# Altium PCB PCB.PcbDoc
Units mm, origin at the board's own origin, x right, y up, seen from the top; angles counter-clockwise.
Board outline 107 x 82 mm, 2 copper layers (Top Layer, Bottom Layer); 41 components, 43 nets, 366 pads, 159 vias.
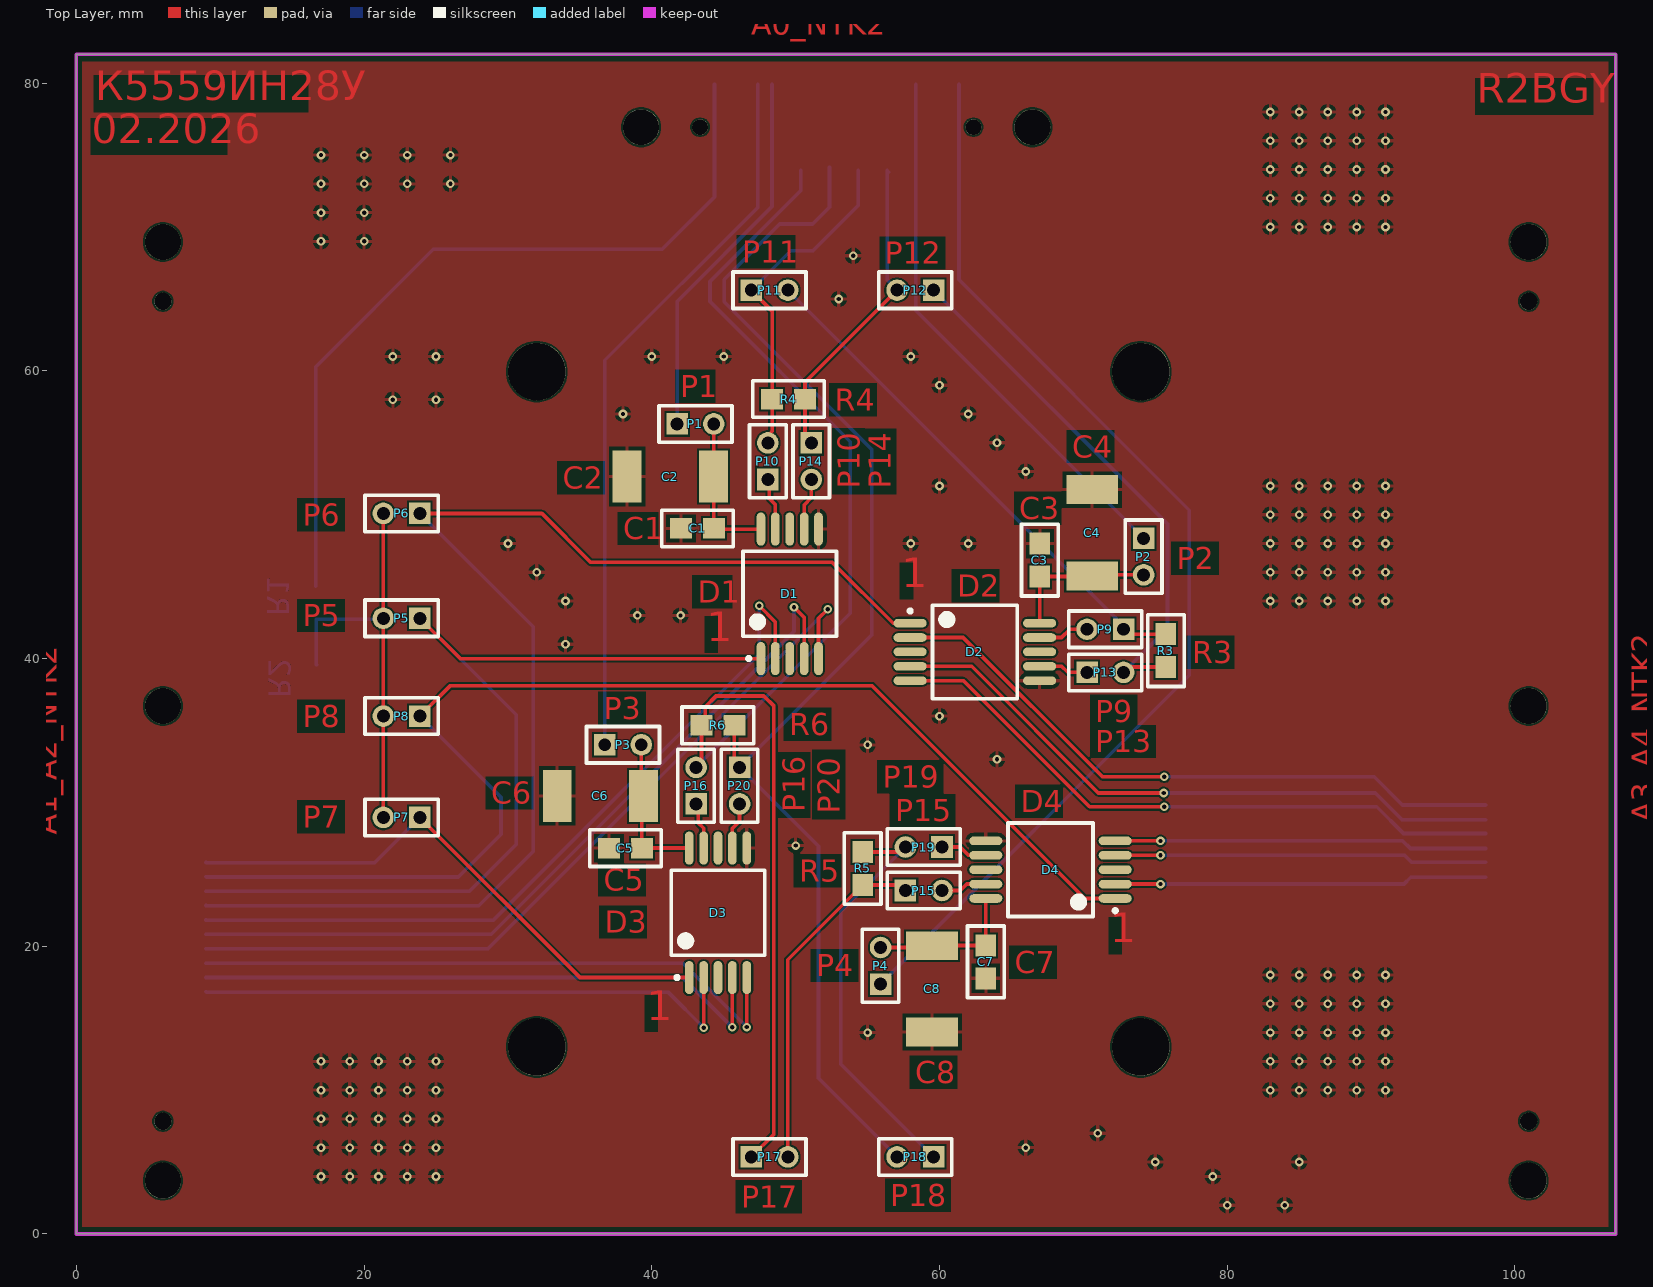
[diagram p0: Top Layer view]
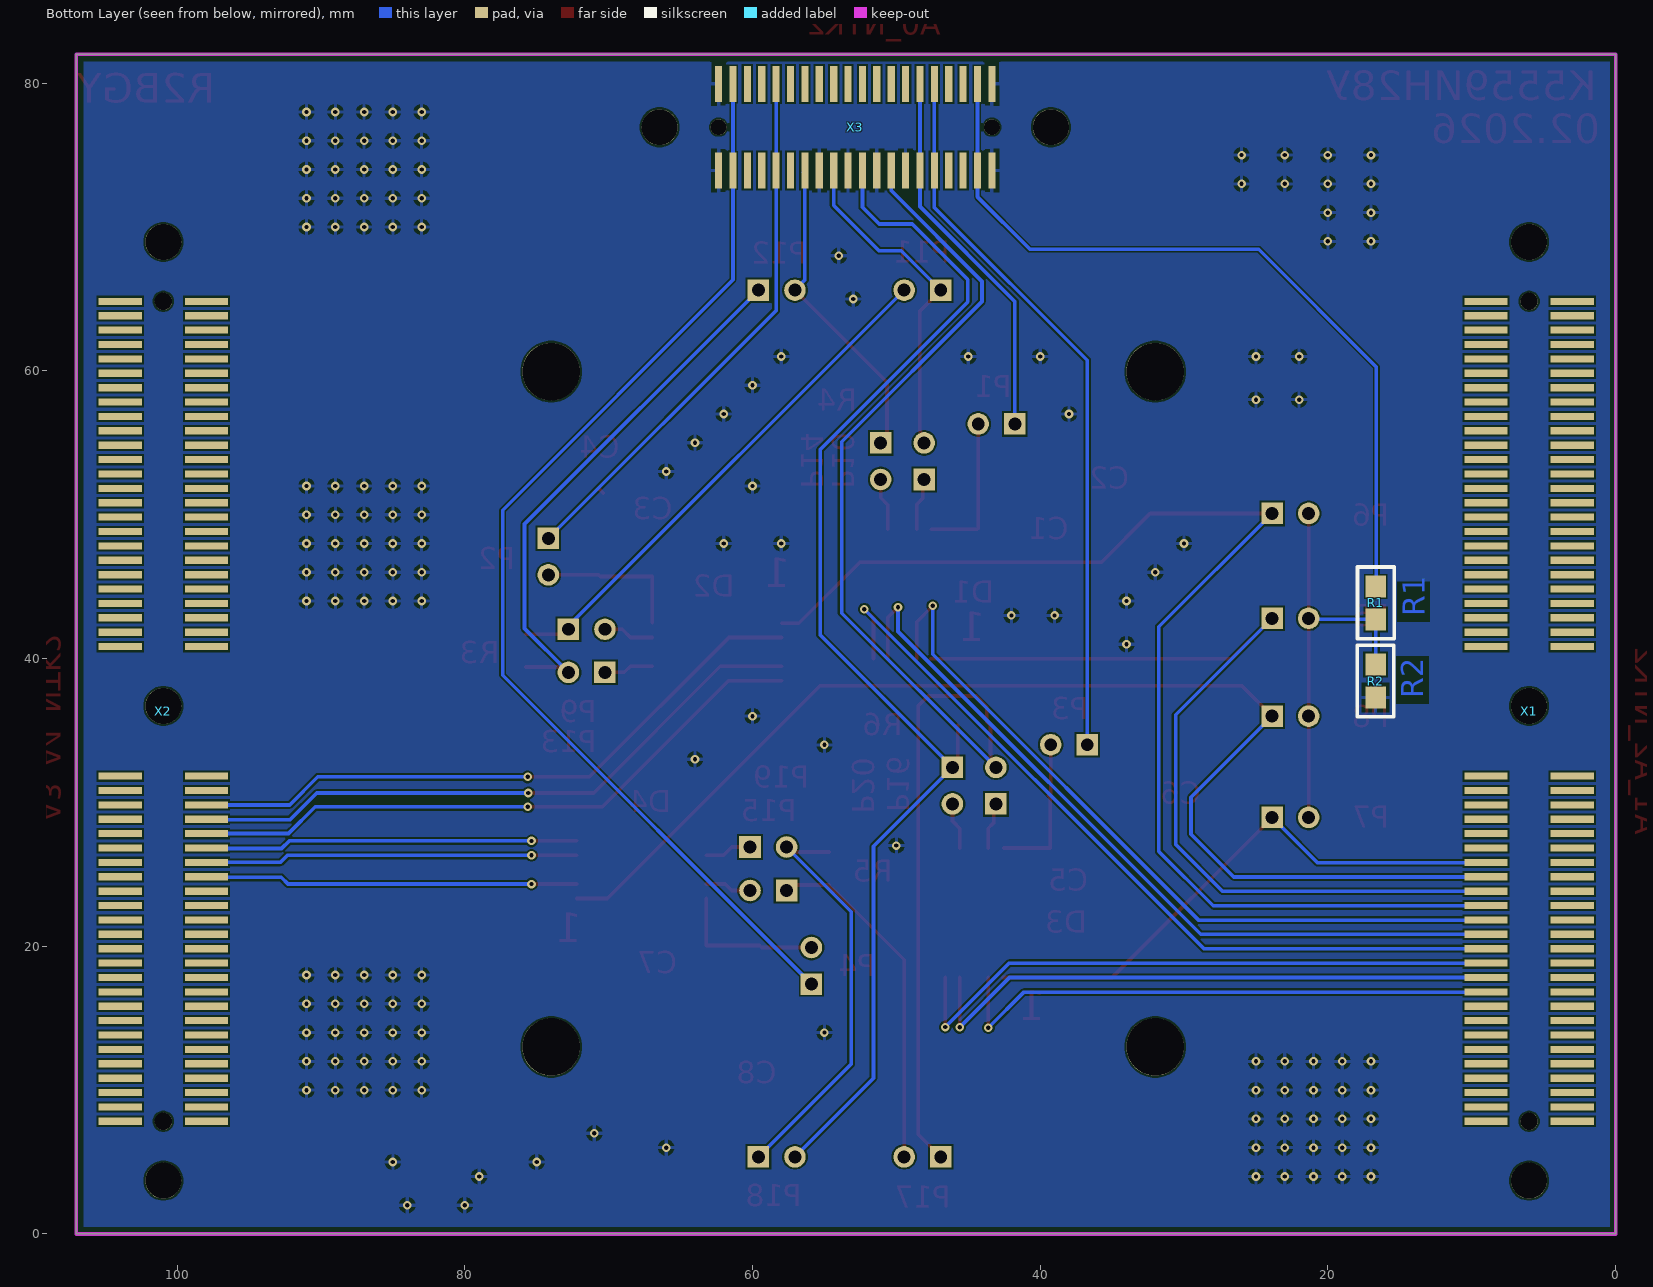
[diagram p1: Bottom Layer view, seen from below]

## Layer stack, top to bottom
Top Solder: solder mask 0.0102, Solder Resist, Dk 3.5
Top Layer: signal copper 0.0356
Dielectric 1: dielectric 0.32, FR-4, Dk 4.8
Bottom Layer: signal copper 0.0356
Bottom Solder: solder mask 0.0102, Solder Resist, Dk 3.5

## Board outline
0,0 0,82 107,82 107,0

## Design rules (kind name [scope] priority, off if disabled: settings)
Clearance [All] p1: gap=0.125 ignorepadtopadclearanceinfootprint=FALSE
DiffPairsRouting [All] p1: maxlimit=0.254 minlimit=0.125 mostfreqgap=0.125 toplayer_minwidth=0.125 toplayer_maxwidth=0.381 toplayer_prefwidth=0.125 bottomlayer_minwidth=0.125 bottomlayer_maxwidth=0.381 bottomlayer_prefwidth=0.125 maxuncoupledlength=12.7
HoleSize [All] p1: absolutevalues=TRUE maxlimit=25.4 minlimit=0.025 maxpercent=80.000 minpercent=20.000
MinimumSolderMaskSliver [All] p1: minsoldermaskwidth=0.1
PolygonConnect [All] p1: connectstyle=Relief reliefconductorwidth=0.254 reliefentries=4 polygonreliefangle="90 Angle" airgapwidth=0.254
RoutingVias [All] p1: holewidth=0.6 width=0.6 viastyle="Through Hole" minholewidth=0.3 minwidth=0 maxholewidth=1.711 maxwidth=1.27
SolderMaskExpansion [All] p1: expansion=0.102 istentingtop=FALSE
UnRoutedNet [All] p1: checkbadconnections=TRUE
Width [All] p1: maxlimit=2.254 minlimit=0.125 preferedwidth=0.254
26 further rules are at their usual default settings.

## Components (designator, comment, footprint, x,y, rotation, side; value= is the part's Value field where it differs from the comment)
C1 "0,01 мкФ" CAP_SMALL 40.673,47.777 r0 top
C2 "10 мкФ" Cap_BIG 45.372,50.749 r90 top
C3 "0,01 мкФ" CAP_SMALL 65.71,49.352 r270 top
C4 "10 мкФ" Cap_BIG 68.707,44.653 r0 top
C5 "0,01 мкФ" CAP_SMALL 35.662,25.552 r0 top
C6 "10 мкФ" Cap_BIG 40.513,28.55 r90 top
C7 "0,01 мкФ" CAP_SMALL 64.491,16.408 r90 top
C8 "10 мкФ" Cap_BIG 61.392,21.133 r180 top
D1 "5559ИН28" 5559IN28 49.589,44.501 r90 top
D2 "5559ИН28" 5559IN28 62.459,40.462 r0 top
D3 "5559ИН28" 5559IN28 44.602,22.327 r90 top
D4 "5559ИН28" 5559IN28 67.716,25.324 r180 top
P1 "Header 2" HDR1X2 41.766,56.312 r0 top
P2 "Header 2" HDR1X2 74.193,48.362 r270 top
P3 "Header 2" HDR1X2 36.728,34.011 r0 top
P4 "Header 2" HDR1X2 55.905,17.374 r90 top
P5 "Header 2" HDR1X2 23.876,42.799 r180 top
P6 "Header 2" HDR1X2 23.876,50.089 r180 top
P7 "Header 2" HDR1X2 23.876,28.956 r180 top
P8 "Header 2" HDR1X2 23.876,36 r180 top
P9 "Header 2" HDR1X2 72.796,42.037 r180 top
P10 "Header 2" HDR1X2 48.065,52.451 r90 top
P11 "Header 2" HDR1X2 46.914,65.608 r0 top
P12 "Header 2" HDR1X2 59.588,65.608 r180 top
P13 "Header 2" HDR1X2 70.256,39.04 r0 top
P14 "Header 2" HDR1X2 51.087,54.991 r270 top
P15 "Header 2" HDR1X2 57.633,23.876 r0 top
P16 "Header 2" HDR1X2 43.078,29.896 r90 top
P17 "Header 2" HDR1X2 46.914,5.359 r0 top
P18 "Header 2" HDR1X2 59.588,5.359 r180 top
P19 "Header 2" HDR1X2 60.173,26.899 r180 top
P20 "Header 2" HDR1X2 46.101,32.436 r270 top
R1 "5,5к" RES 15.418,46.355 r0 bottom
R2 "3к" RES 15.443,40.919 r0 bottom
R3 "100" RES 74.498,38.075 r0 top
R4 "100" RES 47.023,59.284 r270 top
R5 "100" RES 55.905,27.889 r180 top
R6 "100" RES 42.113,36.601 r270 top
X1 "A1_A2_NTK2" A1_A2_NTK2 6.012,36.706 r0 top
X2 "A3_A4_NTK2" A3_A4_NTK2 100.954,36.706 r0 top
X3 "A0_NTK2" A0_NTK2 52.857,76.937 r0 top

## Footprints (in the part's own frame and the unit in brackets; to place one, negate y for a bottom-side part, rotate by r counter-clockwise, add the part's x,y. Pads: shape width x height; smd on the part's side, far side on the other; paste and mask are expansions set on the pad)
5559IN28 [mm] "CFP, 10-Leads, Body 6,50x6,50mm (max), Pitch 1,00mm, IPC Medium Density"
  oval 2.3x0.6 smd: 1(-4.5,2) 2(-4.5,1) 3(-4.5,-1) 4(-4.5,-2) 5(4.5,-2) 6(4.5,-1) 7(4.5,1) 8(4.5,2) ТП1(-4.5,0) ТП2(4.5,0)
  silkscreen extent -4.62,-3.25 2.95,3.25, body extent -3.25,-3.25 3.25,3.25, height 2.9
A0_NTK2 [mm]
  rect 0.5x2.5 smd far side: 0(-9.5,-3) 1(-8.5,-3) 2(-7.5,-3) 3(-6.5,-3) 4(-5.5,-3) 5(-4.5,-3) 6(-3.5,-3) 7(-2.5,-3) 8(-1.5,-3) 9(-0.5,-3) 10(0.5,-3) 11(1.5,-3) 12(2.5,-3) 13(3.5,-3) 14(4.5,-3) 15(5.5,-3) 16(6.5,-3) 17(7.5,-3) 18(8.5,-3) 19(9.5,-3) 20(9.5,3) 21(8.5,3) 22(7.5,3) 23(6.5,3) 24(5.5,3) 25(4.5,3) 26(3.5,3) 27(2.5,3) 28(1.5,3) 29(0.5,3) 30(-0.5,3) 31(-1.5,3) 32(-2.5,3) 33(-3.5,3) 34(-4.5,3) 35(-5.5,3) 36(-6.5,3) 37(-7.5,3) 38(-8.5,3) 39(-9.5,3)
  round 2.5 hole 2.5: ""(-13.6,0) ""(13.6,0)
  round 1.1 hole 1.1: ""(-9.5,0) ""(9.5,0)
A1_A2_NTK2 [mm]
  rect 3x0.5 smd far side: 0(-3,28.125) 1(-3,27.125) 2(-3,26.125) 3(-3,25.125) 4(-3,24.125) 5(-3,23.125) 6(-3,22.125) 7(-3,21.125) 8(-3,20.125) 9(-3,19.125) 10(-3,18.125) 11(-3,17.125) 12(-3,16.125) 13(-3,15.125) 14(-3,14.125) 15(-3,13.125) 16(-3,12.125) 17(-3,11.125) 18(-3,10.125) 19(-3,9.125) 20(-3,8.125) 21(-3,7.125) 22(-3,6.125) 23(-3,5.125) 24(-3,4.125) 25(-3,-4.875) 26(-3,-5.875) 27(-3,-6.875) 28(-3,-7.875) 29(-3,-8.875) 30(-3,-9.875) 31(-3,-10.875) 32(-3,-11.875) 33(-3,-12.875) 34(-3,-13.875) 35(-3,-14.875) 36(-3,-15.875) 37(-3,-16.875) 38(-3,-17.875) 39(-3,-18.875) 40(-3,-19.875) 41(-3,-20.875) 42(-3,-21.875) 43(-3,-22.875) 44(-3,-23.875) 45(-3,-24.875) 46(-3,-25.875) 47(-3,-26.875) 48(-3,-27.875) 49(-3,-28.875) 50(3,-28.875) 51(3,-27.875) 52(3,-26.875) 53(3,-25.875) 54(3,-24.875) 55(3,-23.875) 56(3,-22.875) 57(3,-21.875) 58(3,-20.875) 59(3,-19.875) 60(3,-18.875) 61(3,-17.875) 62(3,-16.875) 63(3,-15.875) 64(3,-14.875) 65(3,-13.875) 66(3,-12.875) 67(3,-11.875) 68(3,-10.875) 69(3,-9.875) 70(3,-8.875) 71(3,-7.875) 72(3,-6.875) 73(3,-5.875) 74(3,-4.875) 75(3,4.125) 76(3,5.125) 77(3,6.125) 78(3,7.125) 79(3,8.125) 80(3,9.125) 81(3,10.125) 82(3,11.125) 83(3,12.125) 84(3,13.125) 85(3,14.125) 86(3,15.125) 87(3,16.125) 88(3,17.125) 89(3,18.125) 90(3,19.125) 91(3,20.125) 92(3,21.125) 93(3,22.125) 94(3,23.125) 95(3,24.125) 96(3,25.125) 97(3,26.125) 98(3,27.125) 99(3,28.125)
  round 1.2 hole 1.2: 0(0,28.125) 1(0,-28.875)
  round 2.5 hole 2.5: 0(0,32.25) 1(0,0) 2(0,-33)
A3_A4_NTK2 [mm]
  rect 3x0.5 smd far side: 0(-3,28.125) 1(-3,27.125) 2(-3,26.125) 3(-3,25.125) 4(-3,24.125) 5(-3,23.125) 6(-3,22.125) 7(-3,21.125) 8(-3,20.125) 9(-3,19.125) 10(-3,18.125) 11(-3,17.125) 12(-3,16.125) 13(-3,15.125) 14(-3,14.125) 15(-3,13.125) 16(-3,12.125) 17(-3,11.125) 18(-3,10.125) 19(-3,9.125) 20(-3,8.125) 21(-3,7.125) 22(-3,6.125) 23(-3,5.125) 24(-3,4.125) 25(-3,-4.875) 26(-3,-5.875) 27(-3,-6.875) 28(-3,-7.875) 29(-3,-8.875) 30(-3,-9.875) 31(-3,-10.875) 32(-3,-11.875) 33(-3,-12.875) 34(-3,-13.875) 35(-3,-14.875) 36(-3,-15.875) 37(-3,-16.875) 38(-3,-17.875) 39(-3,-18.875) 40(-3,-19.875) 41(-3,-20.875) 42(-3,-21.875) 43(-3,-22.875) 44(-3,-23.875) 45(-3,-24.875) 46(-3,-25.875) 47(-3,-26.875) 48(-3,-27.875) 49(-3,-28.875) 50(3,-28.875) 51(3,-27.875) 52(3,-26.875) 53(3,-25.875) 54(3,-24.875) 55(3,-23.875) 56(3,-22.875) 57(3,-21.875) 58(3,-20.875) 59(3,-19.875) 60(3,-18.875) 61(3,-17.875) 62(3,-16.875) 63(3,-15.875) 64(3,-14.875) 65(3,-13.875) 66(3,-12.875) 67(3,-11.875) 68(3,-10.875) 69(3,-9.875) 70(3,-8.875) 71(3,-7.875) 72(3,-6.875) 73(3,-5.875) 74(3,-4.875) 75(3,4.125) 76(3,5.125) 77(3,6.125) 78(3,7.125) 79(3,8.125) 80(3,9.125) 81(3,10.125) 82(3,11.125) 83(3,12.125) 84(3,13.125) 85(3,14.125) 86(3,15.125) 87(3,16.125) 88(3,17.125) 89(3,18.125) 90(3,19.125) 91(3,20.125) 92(3,21.125) 93(3,22.125) 94(3,23.125) 95(3,24.125) 96(3,25.125) 97(3,26.125) 98(3,27.125) 99(3,28.125)
  round 1.2 hole 1.2: 0(0,28.125) 1(0,-28.875)
  round 2.5 hole 2.5: 0(0,32.25) 1(0,0) 2(0,-33)
Cap_BIG [mm] "FROM_MAX"
  rect 3.6x2 smd: 1(1.905,7.092) 2(1.905,1.092)
  body extent 0,-0.01 3.81,8.19, height 2.54
CAP_SMALL [mil] "FROM_MAX"
  rect 60x55.98 smd: 1(53.71,50) 2(143.71,50)
  silkscreen extent 1,0 197,100, body extent 20,18 178,82, height 100
HDR1X2 [mm] "Connector; Header; 2 Position"
  rect 1.5x1.5 hole 0.9: 1(0,0)
  round 1.5 hole 0.9: 2(2.54,0)
  silkscreen extent -1.27,-1.27 3.81,1.27
RES [mil] "FROM_MAX"
  rect 55.98x60 smd: 1(49,52.71) 2(49,142.71)
  silkscreen extent -1,0 99,196, body extent 17,19 81,177, height 100

## Part data
C1 C3 C5 C7: library part CAP_SMALL
C2 C4 C6 C8: library part CAP_BIG
P1 P2 P3 P4 P5 P6 P7 P8 P9 P10 P11 P12 P13 P14 P15 P16 P17 P18 P19 P20: "Header, 2-Pin", LatestRevisionDate=17-Jul-2002, LatestRevisionNote="Re-released for DXP Platform.", Publisher="Altium Limited"
R1 R2 R3 R4 R5 R6: library part RES

## Free pads (board coordinates)
  round 4 hole 4: 22(32.01,59.95) 23(32.01,13) 24(74,13) 25(74,59.95)

## Via types
v1: diameter 0.6, hole 0.3, Top Layer to Bottom Layer, 159 vias

## Nets (pads, with @x,y where several pads share a name; then routed paths per layer and width w, separated by ;. In a path a pad name is that pad's centre, name@x,y a point inside that pad or via, vN(x,y) a via of type N, cw(c..) or ccw(c..) an arc to the next point about the centre after c; other vN are vias at no path point)
AI0+: P12.2 P14.1 R4.2 X3.13 | length 22.2
  Top Layer w0.254: P14.1 50.655,55.424 50.655,55.789 50.648,55.795 R4.2 50.655,58.045 50.655,59.214 P12.2
  Bottom Layer w0.254: X3.13 X3.13@56.479,73.815 ; X3.13@56.363,73.876 56.363,66.311 57.048,65.626 P12.2
AI1+: P10.2 P11.1 R4.1 X3.11 | length 23.7
  Top Layer w0.254: P11.1 48.362,64.16 R4.1 48.362,55.795 48.23,55.664 48.23,55.157 P10.2
  Bottom Layer w0.254: P11.1 49.657,68.351 51.206,68.351 54.357,71.502 X3.11
AI2+: P18.2 P20.1 R6.2 X3.9 | length 88.8
  Top Layer w0.254: R6.2 45.738,32.799 P20.1
  Bottom Layer w0.254: X3.9@52.357,74.142 52.357,71.382 51.181,70.206 48.895,70.206 45.034,66.345 45.034,64.795 55.296,54.534 55.296,41.631 P20.1 51.587,26.949 51.587,10.82 P18.2
AI3+: P16.2 P17.1 R6.1 X3.7 | length 94.4
  Top Layer w0.254: P16.2 43.078,32.67 43.452,33.043 R6.1 43.71,35.614 43.71,36.648 44.463,37.401 47.79,37.401 48.489,36.703 48.489,6.934 P17.1
  Bottom Layer w0.254: P16.2 53.797,43.155 53.797,55.067 44.044,64.821 44.044,66.218 50.357,72.532 X3.7
AY_1: D1.6 P14.2 | length 3.7
  Top Layer w0.254: D1.6 50.589,50.682 51.087,51.181 P14.2
AY_2: D2.6 P13.1 | length 3.5
  Top Layer w0.254: D2.6 68.488,39.462 68.91,39.04 P13.1
AY_3: D3.6 P20.2 | length 3.3
  Top Layer w0.254: D3.6 45.602,28.203 46.101,28.702 P20.2
AY_4: D4.6 P19.1 | length 3.3
  Top Layer w0.254: P19.1 61.443,26.899 62.017,26.324 D4.6
BZ_1: D1.7 P10.1 | length 3.7
  Top Layer w0.254: P10.1 48.176,52.34 48.176,51.12 48.589,50.708 D1.7
BZ_2: D2.7 P9.2 | length 3.5
  Top Layer w0.254: D2.7 68.488,41.462 69.063,42.037 P9.2
BZ_3: D3.7 P16.1 | length 3.3
  Top Layer w0.254: P16.1 43.241,29.734 43.241,28.565 43.602,28.203 D3.7
BZ_4: D4.7 P15.2 | length 3.2
  Top Layer w0.254: P15.2 61.443,23.876 61.89,24.324 D4.7
DE_1: D1.3 X1.63 | length 55.1
  Top Layer w0.254: v1(49.886,43.561) 50.589,42.858 D1.3
  Bottom Layer w0.254: X1.63 28.832,20.831 49.886,41.885 v1(49.886,43.561)
DE_2: D2.3 X2.28 | length 44.4
  Top Layer w0.254: D2.3 62.239,39.462 71.044,30.658 v1(75.58,30.658)
  Bottom Layer w0.254: v1(75.58,30.658) 90.297,30.658 92.151,28.804 X2.28@97.954,28.804
DE_3: D3.3 X1.60 | length 41.5
  Top Layer w0.254: v1(45.602,14.36) D3.3
  Bottom Layer w0.254: X1.60 42.132,17.831 v1(45.602,14.36)
DE_4: D4.3 X2.31 | length 25.9
  Top Layer w0.254: D4.3 v1(75.362,26.324)
  Bottom Layer w0.254: v1(75.362,26.324) 92.32,26.324 92.812,25.832 X2.31
DI_1: D1.4 X1.62 | length 56.7
  Top Layer w0.254: D1.4 51.589,42.8 v1(52.222,43.434)
  Bottom Layer w0.254: X1.62 28.62,19.831 v1(52.222,43.434)
DI_2: D2.4 X2.29 | length 44.4
  Top Layer w0.254: D2.4 61.665,38.462 70.434,29.693 v1(75.616,29.693)
  Bottom Layer w0.254: v1(75.616,29.693) 90.399,29.693 92.253,27.838 X2.29@97.954,27.838
DI_3: D3.4 X1.61 | length 42.9
  Top Layer w0.254: v1(46.602,14.383) D3.4
  Bottom Layer w0.254: X1.61 42.154,18.831 v1(46.602,14.383)
DI_4: D4.4 X2.30 | length 26
  Top Layer w0.254: D4.4 v1(75.362,27.324)
  Bottom Layer w0.254: v1(75.362,27.324) 92.209,27.324 92.735,26.797 X2.30@97.954,26.797
GND: C1.1 C2.1 C3.1 C4.1 C5.1 C6.1 C7.1 C8.1 D1.5 D2.5 D3.5 D4.5 R2.2 X3.0 X3.6 X3.8 X3.10 X3.12 X3.19 X3.20 X3.39 | length 0.3
  Top Layer w0.254: C4.1@70.378,51.511 C4.1
  other v1: 80,2 84,2 17,4 19,4 21,4 23,4 25,4 79,4 75,5 85,5 17,6 19,6 21,6 23,6 25,6 66,6 71,7 17,8 19,8 21,8 23,8 25,8 17,10 19,10 21,10 23,10 25,10 83,10 85,10 87,10 89,10 91,10 17,12 19,12 21,12 23,12 25,12 83,12 85,12 87,12 89,12 91,12 55,14 83,14 85,14 87,14 89,14 91,14 83,16 85,16 87,16 89,16 91,16 83,18 85,18 87,18 89,18 91,18 50,27 64,33 55,34 60,36 34,41 39,43 42,43 34,44 83,44 85,44 87,44 89,44 91,44 32,46 83,46 85,46 87,46 89,46 91,46 30,48 58,48 62,48 83,48 85,48 87,48 89,48 91,48 83,50 85,50 87,50 89,50 91,50 60,52 83,52 85,52 87,52 89,52 91,52 66,53 64,55 38,57 62,57 22,58 25,58 60,59 22,61 25,61 40,61 45,61 58,61 53,65 54,68 17,69 20,69 83,70 85,70 87,70 89,70 91,70 17,71 20,71 83,72 85,72 87,72 89,72 91,72 17,73 20,73 23,73 26,73 83,74 85,74 87,74 89,74 91,74 17,75 20,75 23,75 26,75 83,76 85,76 87,76 89,76 91,76 83,78 85,78 87,78 89,78 91,78
NetP9_1: P9.1 P11.2 R3.2 | length 36.3
  Top Layer w0.254: P9.1 73.134,41.699 R3.2
  Bottom Layer w0.254: P11.2 72.3,42.762 72.3,42.533 P9.1
NetP12_1: P12.1 P13.2 R3.1 | length 37.7
  Top Layer w0.254: P13.2 73.03,39.04 73.404,39.413 R3.1
  Bottom Layer w0.254: P12.1 75.844,49.352 75.844,42.088 P13.2
NetP15_1: P15.1 P17.2 R5.2 | length 24.2
  Top Layer w0.254: P17.2 49.454,19.057 54.216,23.82 54.267,23.82 54.661,24.213 R5.2 57.244,24.264 P15.1
NetP18_1: P18.1 P19.2 R5.1 | length 30.2
  Top Layer w0.254: R5.1 57.05,26.55 57.399,26.899 P19.2
  Bottom Layer w0.254: P18.1 53.137,11.811 53.137,22.403 56.884,26.15 ; 56.884,26.15 P19.2 56.884,26.15
nRE_1: D1.2 X1.64 | length 53.6
  Top Layer w0.254: v1(47.473,43.663) 48.589,42.546 D1.2
  Bottom Layer w0.254: X1.64 9.025,21.819 28.991,21.819 47.473,40.301 v1(47.473,43.663)
nRE_2: D2.2 X2.27 | length 44.8
  Top Layer w0.254: D2.2 61.636,41.462 71.323,31.775 v1(75.626,31.775)
  Bottom Layer w0.254: v1(75.626,31.775) 90.221,31.775 92.177,29.82 X2.27@97.954,29.82
nRE_3: D3.2 X1.59 | length 39.1
  Top Layer w0.254: v1(43.602,14.342) D3.2
  Bottom Layer w0.254: X1.59 9.029,16.815 41.129,16.815 v1(43.602,14.342)
nRE_4: D4.2 X2.32 | length 25.9
  Top Layer w0.254: D4.2 v1(75.362,24.324)
  Bottom Layer w0.254: v1(75.362,24.324) 92.294,24.324 92.761,24.79 X2.32@97.954,24.79
RO_1: D1.1 P5.1 X1.66 | length 66.3
  Top Layer w0.254: P5.1 26.678,39.997 D1.1@47.589,39.997
  Bottom Layer w0.254: X1.66 9.019,23.825 27.33,23.825 30.582,27.076 30.582,36.093 P5.1
RO_2: D2.1 P6.1 X1.65 | length 88.3
  Top Layer w0.254: P6.1 32.36,50.089 35.763,46.685 52.553,46.685 56.776,42.462 D2.1
  Bottom Layer w0.254: X1.65 9.035,22.809 27.965,22.809 31.75,26.594 31.75,42.215 P6.1
RO_3: D3.1 P7.1 X1.68 | length 39.6
  Top Layer w0.254: P7.1 35.005,17.827 D3.1 ; P7.1@24.257,28.956 P7.1@24.297,28.996
  Bottom Layer w0.254: X1.68 9.037,25.806 20.726,25.806 P7.1
RO_4: D4.1 P8.1 X1.67 | length 87.6
  Top Layer w0.254: P8.1 25.976,38.1 55.321,38.1 70.097,23.324 D4.1
  Bottom Layer w0.254: X1.67 9.028,24.816 26.543,24.816 29.515,27.788 29.515,30.361 P8.1
VCC1: P1.1 X3.5 X3.34 | length 26.4
  Bottom Layer w0.254: P1.1 41.766,64.829 48.357,71.421 X3.34
VCC1cap: C1.2 C2.2 D1.8 P1.2 | length 10.8
  Top Layer w0.254: P1.2 44.306,49.065 C1.2 44.37,49.001 D1.8@47.557,49.001
  Bottom Layer w0.254: P1.2 P1.2@44.306,56.58
VCC2: P2.1 X3.15 X3.24 | length 38.1
  Bottom Layer w0.254: X3.24 58.357,64.198 P2.1
VCC2cap: C3.2 C4.2 D2.8 P2.2 | length 10.5
  Top Layer w0.254: D2.8@66.959,42.505 66.959,45.681 C3.2 70.569,45.702 C4.2 70.688,45.822 P2.2
VCC3: P3.1 X3.4 X3.35 | length 50.3
  Bottom Layer w0.254: P3.1 36.728,60.731 47.357,71.36 X3.35
VCC3cap: C5.2 C6.2 D3.8 P3.2 | length 10.5
  Top Layer w0.254: P3.2 39.268,30.607 C6.2 39.312,30.346 C5.2 39.316,26.827 D3.8@42.545,26.827
VCC4: P4.1 X3.18 X3.21 | length 78.1
  Bottom Layer w0.254: P4.1 77.368,38.837 77.368,50.317 61.357,66.328 X3.21
VCC4cap: C7.2 C8.2 D4.8 P4.2 | length 10.6
  Top Layer w0.254: P4.2 59.36,19.914 C8.2 59.505,20.059 C7.2 D4.8@63.221,23.324
VCCR: R1.1 X3.1 X3.38 | length 55.7
  Bottom Layer w0.254: R1.1@16.637,45.016 16.637,60.274 24.816,68.453 40.716,68.453 44.357,72.094 X3.1 X3.38
VREF: P5.2 P6.2 P7.2 P8.2 R1.2 R2.1 | length 29
  Top Layer w0.254: P5.2@21.329,42.806 P5.2 ; P7.2 P8.2 P5.2 ; P6.2 P5.2
  Bottom Layer w0.254: R2.1 16.662,39.606 R1.2 21.267,42.73 P5.2
pads on no net: D1.ТП1 D1.ТП2 D2.ТП1 D2.ТП2 D3.ТП1 D3.ТП2 D4.ТП1 D4.ТП2 X1.0 X1.1 X1.2 X1.3 X1.4 X1.5 X1.6 X1.7 X1.8 X1.9 X1.10 X1.11 X1.12 X1.13 X1.14 X1.15 X1.16 X1.17 X1.18 X1.19 X1.20 X1.21 X1.22 X1.23 X1.24 X1.25 X1.26 X1.27 X1.28 X1.29 X1.30 X1.31 X1.32 X1.33 X1.34 X1.35 X1.36 X1.37 X1.38 X1.39 X1.40 X1.41 X1.42 X1.43 X1.44 X1.45 X1.46 X1.47 X1.48 X1.49 X1.50 X1.51 X1.52 X1.53 X1.54 X1.55 X1.56 X1.57 X1.58 X1.69 X1.70 X1.71 X1.72 X1.73 X1.74 X1.75 X1.76 X1.77 X1.78 X1.79 X1.80 X1.81 X1.82 X1.83 X1.84 X1.85 X1.86 X1.87 X1.88 X1.89 X1.90 X1.91 X1.92 X1.93 X1.94 X1.95 X1.96 X1.97 X1.98 X1.99 X2.0 X2.1 X2.2 X2.3 X2.4 X2.5 X2.6 X2.7 X2.8 X2.9 X2.10 X2.11 X2.12 X2.13 X2.14 X2.15 X2.16 X2.17 X2.18 X2.19 X2.20 X2.21 X2.22 X2.23 X2.24 X2.25 X2.26 X2.33 X2.34 X2.35 X2.36 X2.37 X2.38 X2.39 X2.40 X2.41 X2.42 X2.43 X2.44 X2.45 X2.46 X2.47 X2.48 X2.49 X2.50 X2.51 X2.52 X2.53 X2.54 X2.55 X2.56 X2.57 X2.58 X2.59 X2.60 X2.61 X2.62 X2.63 X2.64 X2.65 X2.66 X2.67 X2.68 X2.69 X2.70 X2.71 X2.72 X2.73 X2.74 X2.75 X2.76 X2.77 X2.78 X2.79 X2.80 X2.81 X2.82 X2.83 X2.84 X2.85 X2.86 X2.87 X2.88 X2.89 X2.90 X2.91 X2.92 X2.93 X2.94 X2.95 X2.96 X2.97 X2.98 X2.99 X3. X3.2 X3.3 X3.14 X3.16 X3.17 X3.22 X3.23 X3.25 X3.26 X3.27 X3.28 X3.29 X3.30 X3.31 X3.32 X3.33 X3.36 X3.37

## Polygon pours and split planes (outlines as drawn)
GND on Bottom Layer "Top Overlay-No Net" (solid, remove dead copper, pour order 0): 0.4,0.5 0.4,81.5 106.5,81.5 106.5,0.5
GND on Top Layer "GND_L01_P004" (solid, remove dead copper, pour order 4): 0.4,0.5 0.4,81.5 106.5,81.5 106.5,0.5

## Keep-outs
Keep-Out Layer:
  the board outline again, w0.254

## Other copper
Top Layer:
  text "К5559ИН28У" at 1.311,78.105 h3.52
  text "R2BGY" at 97.348,77.927 h3.52
  text "02.2026" at 1.075,75.133 h3.52
  text "1" at 57.379,44.247 h3.52
  text "1" at 43.815,40.513 h3.52
  text "1" at 71.882,19.583 h3.52
  text "1" at 39.649,14.173 h3.52